# Altium PCB 1K5_Power_Factor_V0.PcbDoc (part 2 of 2)
Units mm, origin at the board's own origin, x right, y up, seen from the top; angles counter-clockwise.
Board outline 100 x 100.08 mm, 2 copper layers (Top Layer, Bottom Layer); 98 components, 49 nets, 261 pads, 152 vias.
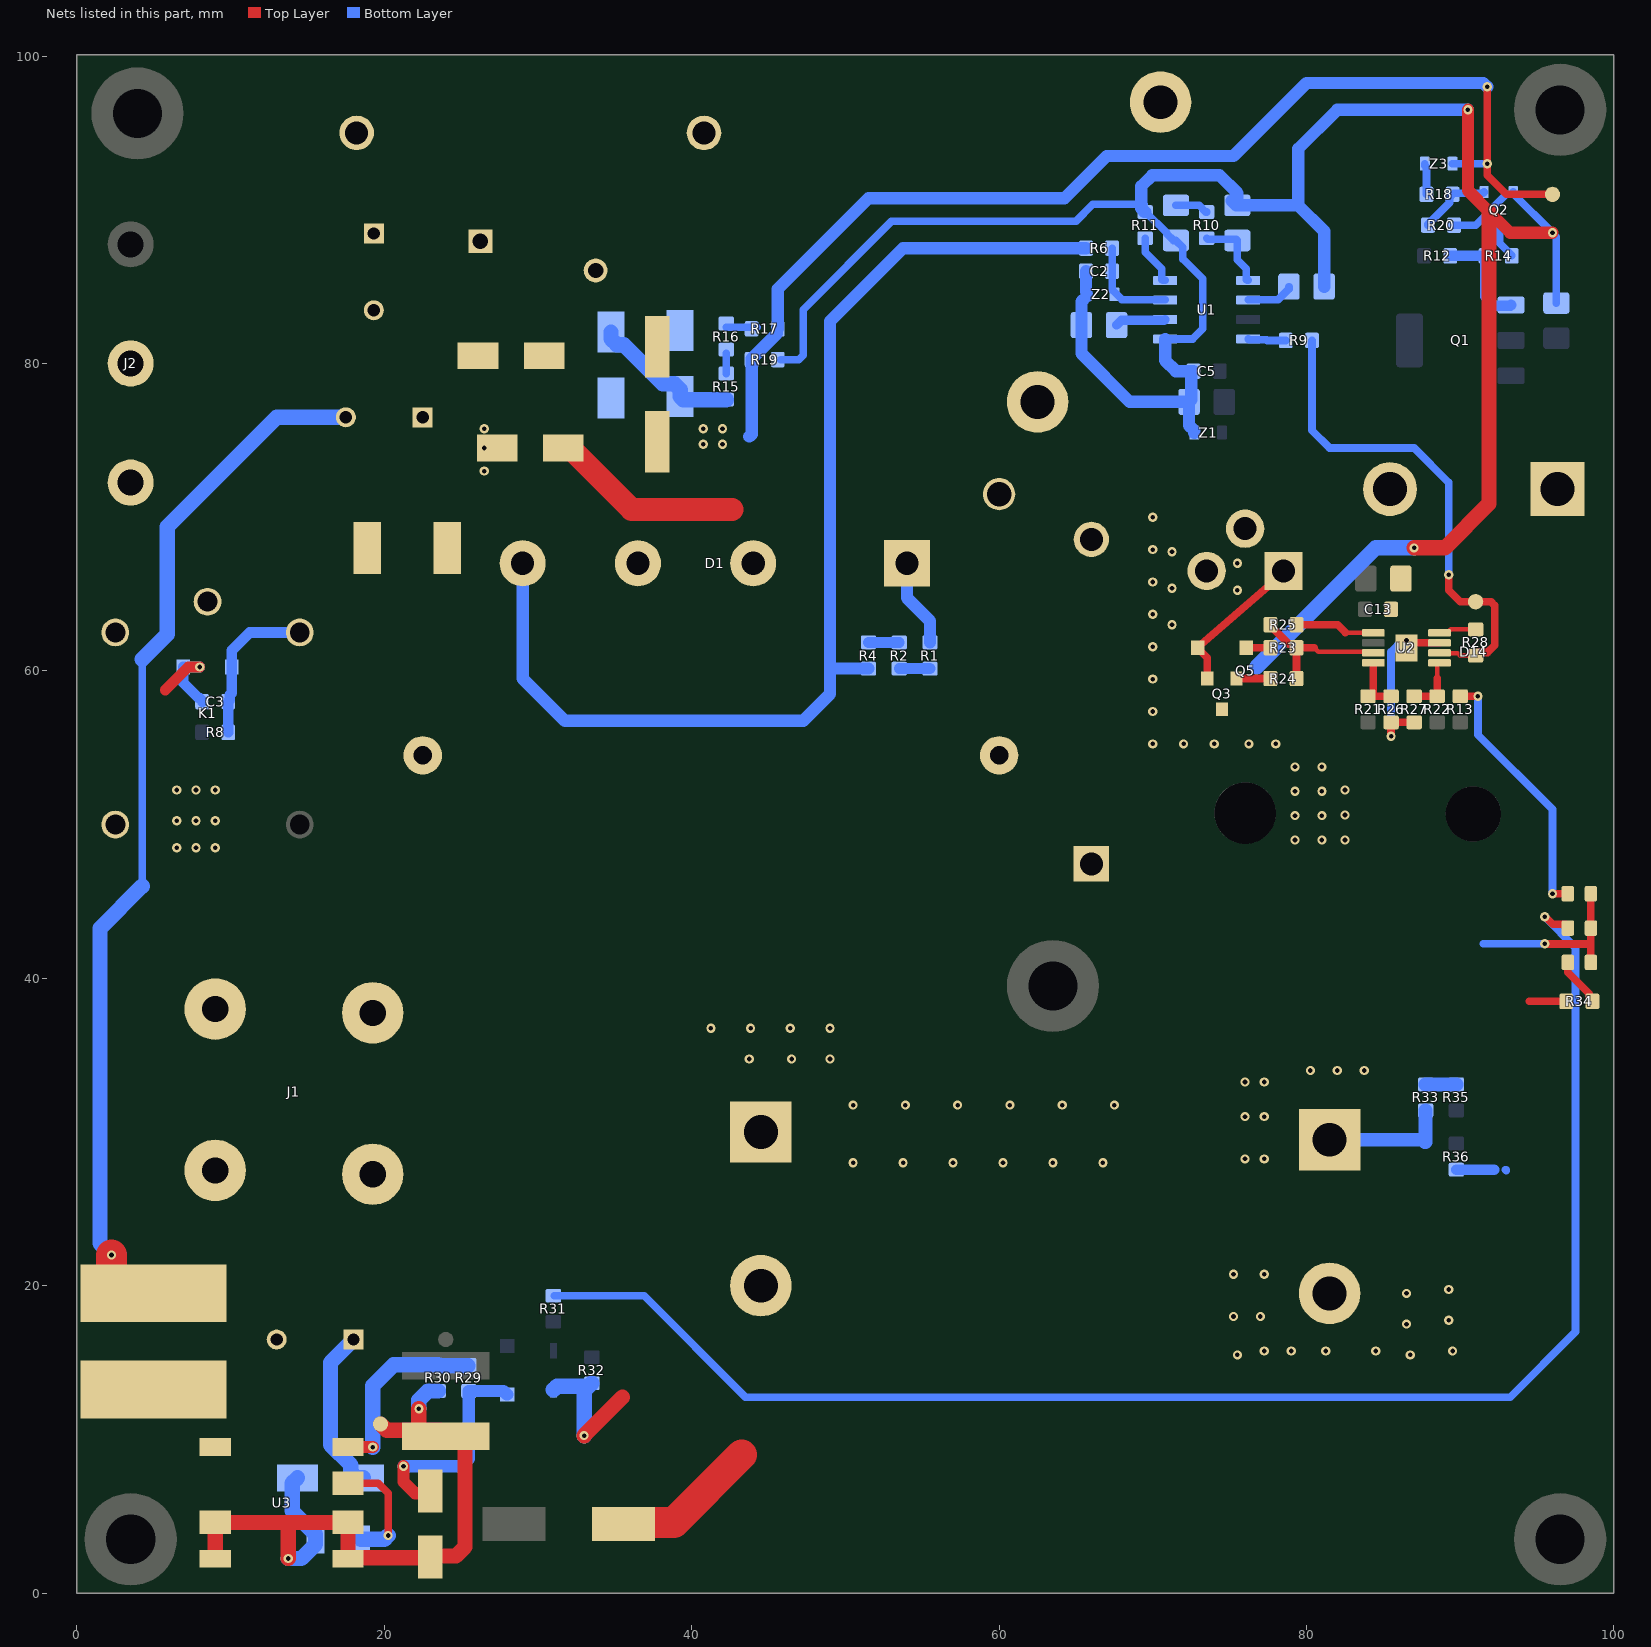
[diagram p2: the nets of this part, all layers, seen from the top]

## Via types
v1: diameter 0.6, hole 0.3, Top Layer to Bottom Layer, 112 vias
v2: diameter 1, hole 0.4, Top Layer to Bottom Layer, 40 vias

## Nets (pads, with @x,y where several pads share a name; then routed paths per layer and width w, separated by ;. In a path a pad name is that pad's centre, name@x,y a point inside that pad or via, vN(x,y) a via of type N, cw(c..) or ccw(c..) an arc to the next point about the centre after c; other vN are vias at no path point) (continued)
GND: C2.1 C3.1 C4.1 C5.1 C6.1 C7.1 C8.1 C9.1 C10.2 C11.1 C12.1 C13.1 C16.1 C17.1 C18.1 C19.2 C20.2 D2.2 D5.K D10.2 D11.K D12.2 D15.K J1.2 K1.2 Q2.2 Q3.3 Q5.3 R7.1 R11.1 R19.2 R20.2 R26.2 R27.2 R32.2 R36.2 U1.1 U2.3 U2.9 Z1.1 Z2.1 Z4.2 | length 224.6
  Top Layer w0.5: v1(85.5,55.75) R26.2@85.5,56.65 R27.2@87,56.65 ; v1(86.5,62) 86.675,61.825 U2.3@88.65,61.825 ; v1(95.5,42.25) 95.515,42.235 98.5,42.235 ; D15.K@98.5,41.032 98.5,42.235 ; D5.K@98.5,45.5 D11.K@98.5,43.266 98.5,42.235
  Top Layer w0.7: 5.75,58.75 7.25,60.25 v1(8,60.25)
  Top Layer w0.8: v1(90.5,96.5) 90.5,91.25 91.875,89.875 93.25,88.5 v1(96,88.5)
  Top Layer w1: v1(33,10.25) 35.5,12.75 ; v1(87,68) 89,68 91.875,70.875 91.875,89.875
  Top Layer w2: C17.1@35.55,4.5 35.646,4.596 38.846,4.596 43.257,9.007
  Bottom Layer w0.5: R19.2@45.8,80.25 46.957,80.25 47.25,80.543 47.25,83.5 53,89.25 65,89.25 66.1,90.35 69.25,90.35 69.45,90.35 ; R11.1@69.5,89.85 69.55,89.85 70.9,88.5 70.9,88.45 71.35,88 C8.1@71.5,88 71.95,87.55 71.95,86.8 73.25,85.5 73.25,82.25 72.595,81.595 U1.1@70.8,81.595 ; v1(85.5,55.75) 85.5,61.25 86.231,61.981 86.481,61.981 v1(86.5,62) ; R20.2@89.6,89 91,89 93,91 93.4,91 Q2.2@93.45,91.05 ; 91.5,42.25 v1(95.5,42.25) ; 92.95,27.55 cw(c92.95,27.5) 93,27.5 ; Q2.2@93.45,91.15 Q2.2@93.45,91.05 ; C10.2@96.25,83.929 96.25,88.223 96,88.473 v1(96,88.5) Q2.2@93.45,91.05
  Bottom Layer w0.7: v1(8,60.25) D2.2@6.925,60.25 6.925,59.225 7.9,58.25 7.95,58.25 8.15,58.05 C3.1@8.15,58 ; R36.2@89.75,27.55 92.2,27.55
  Bottom Layer w0.8: C2.1@65.65,86 65.658,85.75 65.658,84.7 Z2.1@65.7,84.5 65.7,84.375 65.357,84.032 C6.1@65.357,82.5 65.357,80.643 68.5,77.5 C4.1@72.357,77.5 ; R11.1@69.5,89.85 69.45,89.85 69.4,89.9 69.4,89.95 69.25,90.1 69.25,90.35 69.25,91.531 69.969,92.25 74.331,92.25 75.5,91.081 C9.1@75.5,90.286 ; U1.1@70.8,81.595 70.8,80.2 71.5,79.5 C5.1@72.65,79.5 72.503,79.353 72.503,77.646 C4.1@72.357,77.5 ; Z1.1@72.7,75.5 72.7,75.625 72.357,75.968 C4.1@72.357,77.5 ; C9.1@75.125,90.586 75.425,90.286 C9.1@75.5,90.286 ; C7.1@81.143,85 81.143,88.607 79.464,90.286 ; v1(90.5,96.5) 82,96.5 79.464,93.964 79.464,90.286 ; C9.1@75.5,90.286 79.464,90.286
  Bottom Layer w1: C18.1@18,16.5 16.5,15 16.5,9.65 17.825,8.325 17.825,7.875 18.2,7.5 D10.2@18.65,7.5 ; Z4.2@31,13.23 31.238,13.468 R32.2@33.318,13.468 ; v1(33,10.25) 33,13.15 R32.2@33.318,13.468 ; R32.2@33.5,13.65 R32.2@33.318,13.468 ; 76.75,60.25 84.5,68 v1(87,68)
  other v1: 75.5,15.5 86.75,15.5 77.25,15.75 79,15.75 81.25,15.75 84.5,15.75 89.5,15.75 86.5,17.5 89.25,17.75 75.25,18 77,18 86.5,19.5 89.25,19.75 75.25,20.75 77.25,20.75 79.25,49 81,49 82.5,49 79.25,50.583 81,50.583 82.5,50.625 79.25,52.167 81,52.167 82.5,52.25 79.25,53.75 81,53.75 70,55.25 72,55.25 74,55.25 76.25,55.25 78,55.25 70,57.357 70,59.464 70,61.571 71.25,63 70,63.679 75.5,65.25 71.25,65.375 70,65.786 75.5,67 71.25,67.75 70,67.893 70,70
ISENSE: C2.2 R6.2 U1.3 Z2.2 | length 6.4
  Bottom Layer w0.5: R6.2@67.35,87.5 C2.2@67.35,86 67.35,84.785 68,84.135 U1.3@70.8,84.135
NetC1_1: C1.1 D1.4 R4.2 R6.1 R7.2 | length 74.7
  Bottom Layer w0.8: D1.4@29,67 29,59.5 31.75,56.75 47.25,56.75 49,58.5 49,60.15 ; R4.2@51.5,60.15 49,60.15 ; R6.1@65.65,87.5 53.75,87.5 49,82.75 49,60.15
NetC1_2: C1.2 D1.1 D13.2 L3.1 R1.1 TP5.1 | length 5.8
  Bottom Layer w0.8: D1.1@54,67 54,64.75 55.5,63.25 R1.1@55.5,61.85
NetC3_2: C3.2 D2.1 K1.5 R8.2 | length 10.3
  Bottom Layer w0.7: R8.2@9.85,56 C3.2@9.85,58 9.95,58.1 9.95,58.435 10.075,58.56 10.075,61.325 11.25,62.5 K1.5@14.5,62.5
NetC6_2: C6.2 U1.2 | length 3.3
  Bottom Layer w0.6: C6.2@67.643,82.5 67.958,82.815 70.75,82.815 U1.2@70.8,82.865
NetC8_2: C8.2 R10.2 | length 2.2
  Bottom Layer w0.5: C8.2@71.5,90.286 73.014,90.286 73.45,89.85 R10.2@73.5,89.85
NetC9_2: C9.2 R10.1 U1.5 | length 5
  Bottom Layer w0.5: R10.1@73.5,88.15 73.575,88.075 75.425,88.075 C9.2@75.5,88 75.5,86.75 76.088,86.162 76.088,85.455 76.138,85.405 U1.5@76.2,85.405
NetC11_2: C11.2 R17.1 R19.1 TP2.1 Z3.2 | length 74.9
  Top Layer w0.5: v1(91.75,98) v1(91.75,93) 91.75,92.25 93,91 TP2.1@96,91
  Bottom Layer w0.5: Z3.2@89.5,93 v1(91.75,93)
  Bottom Layer w0.8: 43.75,75.25 43.9,75.4 R19.1@43.9,80.25 43.9,80.3 45.55,81.95 45.55,82.2 R17.1@45.6,82.25 45.6,84.85 51.5,90.75 64.25,90.75 67,93.5 75.25,93.5 80,98.25 91.5,98.25 v1(91.75,98)
  other v1: 40.75,74.75 42,74.75 40.75,75.75 42,75.75
NetC14_1: C14.1 C15.2 D10.1 L1.1 R30.2 TP3.1 U3.1 U3.2 U3.7 U3.8 | length 47.7
  Top Layer w1: U3.8@9,2.236 U3.7@9,4.598 13.75,4.598 ; v1(13.75,2.25) 13.75,4.598 ; TP3.1@19.75,11 20.15,10.6 L1.1@22.25,10.6 ; v1(22.25,12) L1.1@22.25,10.6 ; 13.75,4.598 U3.2@17.636,4.598 U3.1@17.636,2.236 17.693,2.293 22.943,2.293 C14.1@23,2.35 23.064,2.414 24.664,2.414 25.25,3 25.25,9.8 25.5,9.8 25.1,10.2 L1.1@24,10.2 23.6,10.6 L1.1@22.25,10.6
  Bottom Layer w1: v1(13.75,2.25) 14.605,2.25 15.525,3.17 C15.2@15.525,3.5 15.525,3.83 14,5.355 14,7.15 D10.1@14.35,7.5 ; v1(22.25,12) 22.25,12.564 22.836,13.15 R30.2@23.5,13.15
NetC14_2: C14.2 D8.1 R29.1 | length 14.6
  Top Layer w0.8: v1(21.25,8.25) 21.25,7.25 22,6.5 22.85,6.5 C14.2@23,6.65
  Bottom Layer w0.8: v1(21.25,8.25) 25,8.25 25.5,8.75 25.5,12.925 R29.1@25.5,13.15 27.75,13.15 27.975,12.925 D8.1@28,12.925
NetC15_1: C15.1 U3.3 | length 7.5
  Top Layer w0.5: U3.3@17.636,7.138 19.612,7.138 20.25,6.5 v1(20.25,3.75)
  Bottom Layer w1: C15.1@18.475,3.5 20,3.5 v1(20.25,3.75)
NetC16_2: C16.2 D9.1 L2.1 | length 69.3
  Top Layer w2: v1(2.25,22) 2.25,20.375 3.125,19.5 L2.1@5,19.5
  Bottom Layer w0.5: 4.25,46 4.25,60.75
  Bottom Layer w1: 2.75,22 v1(2.25,22) 1.5,22.75 1.5,43.25 4.25,46 ; 4.25,60.75 5.875,62.375 5.875,69.375 13,76.5 C16.2@17.5,76.5
  other v1: 26.5,73 26.5,74.5 26.5,75.75
NetC18_2: C18.2 L2.2 U3.5
NetD1_2: D1.2 D3.2 D9.2 F1.2 R3.2 | length 12.6
  Top Layer w1.5: D9.2@31.65,74.5 32.1,74.5 36.1,70.5 42.617,70.5
NetD1_3: D1.3 D4.2 D12.1 K1.3 R5.2
  other v1: 6.5,48.5 7.75,48.5 9,48.5 6.5,50.25 7.75,50.25 9,50.25 6.5,52.25 7.75,52.25 9,52.25
NetD3_1: D3.1 D4.1 R15.1 | length 9.8
  Bottom Layer w1: D4.1@34.75,82.05 34.75,81.6 35.125,81.225 35.575,81.225 38.125,78.675 38.875,78.675 39.25,78.3 D3.1@39.25,77.85 39.45,77.65 R15.1@42.25,77.65
NetD5_A: D5.A R13.2 | length 17
  Top Layer w0.5: R13.2@90,58.35 v1(91.15,58.35) ; v1(96,45.5) D5.A@97,45.5
  Bottom Layer w0.5: v1(91.15,58.35) 91.15,55.85 96,51 v1(96,45.5)
NetD6_1: D6.1 Q3.2 Q5.1 | length 9.8
  Top Layer w0.5: Q3.2@73.55,59.5 73.55,60.85 72.925,61.475 D6.1@72.925,61.5 73.125,61.725 77.5,65.5 Q5.1@78.5,66.5
NetD6_2: D6.2 R23.1 | length 1.6
  Top Layer w0.5: D6.2@76.075,61.5 R23.1@77.65,61.5
NetD11_A: D11.A R31.2 | length 100.6
  Top Layer w0.5: v1(95.5,44) 95.527,44 96.011,43.516 96.85,43.516 97,43.366 D11.A@97,43.266
  Bottom Layer w0.5: R31.2@31.05,19.35 36.9,19.35 43.5,12.75 93.25,12.75 97.5,17 97.5,42 v1(95.5,44)
NetD14_2: D14.2 L3.2 Q5.2
NetD15_A: D15.A R34.2 | length 3.2
  Top Layer w0.5: D15.A@97,41.032 97,40.4 98.4,39 98.4,38.7 R34.2@98.6,38.5
NetF1_1: F1.1 J2.2
NetJ2_1: J2.1 K1.1 R3.1 R5.1
NetQ1_1: Q1.1 R12.2 R14.1 | length 6.9
  Bottom Layer w0.7: R12.2@89.35,87 R14.1@91.65,87 91.65,84.35 92.25,83.75 93.25,83.75 Q1.1@93.3,83.8
NetQ2_1: Q2.1 R18.2 R20.1 | length 4.8
  Bottom Layer w0.5: R20.1@87.9,89 87.9,89.05 89.3,90.45 89.3,90.8 R18.2@89.5,91 89.575,91.075 91.5,91.075 91.55,91.125 Q2.1@91.55,91.15
NetQ2_3: Q2.3 R14.2 | length 2.5
  Bottom Layer w0.5: Q2.3@92.5,88.85 92.5,88.928 92.55,88.978 92.55,87.85 93.35,87.05 R14.2@93.35,87
NetQ3_1: Q3.1 R24.1 | length 2.2
  Top Layer w0.5: Q3.1@75.45,59.5 R24.1@77.65,59.5
NetR1_2: R1.2 R2.1 | length 2
  Bottom Layer w0.7: R2.1@53.5,60.15 R1.2@55.5,60.15
NetR2_2: R2.2 R4.1 | length 2
  Bottom Layer w0.7: R4.1@51.5,61.85 R2.2@53.5,61.85
NetR9_1: R9.1 U1.8 | length 2.5
  Bottom Layer w0.5: U1.8@76.2,81.595 76.25,81.545 77.405,81.545 77.45,81.5 R9.1@78.65,81.5
NetR9_2: R9.2 R28.2 TP1.1 U2.2 | length 33.1
  Top Layer w0.3: U2.2@88.65,61.175 88.675,61.15 89.835,61.15 89.985,61 R28.2@91,61
  Top Layer w0.5: v1(89.25,66.25) 89.25,65.25 90,64.5 TP1.1@91,64.5 92,64.5 92.25,64.25 92.25,61.676 91.774,61.2 91.2,61.2 R28.2@91,61
  Bottom Layer w0.5: R9.2@80.35,81.5 80.35,75.65 81.5,74.5 87,74.5 89.25,72.25 v1(89.25,66.25)
NetR11_2: R11.2 U1.4 | length 3.4
  Bottom Layer w0.5: R11.2@69.5,88.15 69.507,88.143 69.507,87.243 70.588,86.162 70.588,85.455 70.638,85.405 U1.4@70.8,85.405
NetR15_2: R15.2 R16.1 | length 1.3
  Bottom Layer w0.5: R15.2@42.25,79.35 R16.1@42.25,80.65
NetR16_2: R16.2 R17.2 | length 2
  Bottom Layer w0.5: R16.2@42.25,82.35 R17.2@44.25,82.35
NetR18_1: R18.1 Z3.1 | length 2
  Bottom Layer w0.5: Z3.1@87.7,93 87.7,92.875 87.8,92.775 R18.1@87.8,91
NetR21_2: R21.2 R26.1 U2.8 | length 3.8
  Top Layer w0.5: U2.8@84.35,60.525 84.35,58.65 84.05,58.35 R21.2@84,58.35 R26.1@85.5,58.35
NetR22_2: R22.2 R27.1 U2.1 | length 3.8
  Top Layer w0.3: 88.5,59.5 88.5,60.435 88.59,60.525 U2.1@88.65,60.525
  Top Layer w0.5: R27.1@87,58.35 R22.2@88.5,58.35 88.5,59.5
NetR23_2: R23.2 R24.2 R25.1 U2.7 | length 9.2
  Top Layer w0.3: 80.5,61.5 80.765,61.235 84.29,61.235 U2.7@84.35,61.175
  Top Layer w0.5: R25.1@77.65,63 77.65,62.95 78.85,61.75 R23.2@79.15,61.75 ; R24.2@79.35,59.5 R23.2@79.35,61.5 80.5,61.5
NetR25_2: R25.2 U2.5 | length 5.2
  Top Layer w0.3: 82.525,62.5 82.55,62.475 U2.5@84.35,62.475
  Top Layer w0.5: R25.2@79.35,63 82.025,63 82.525,62.5
NetR28_1: R28.1 U2.4 | length 2.4
  Top Layer w0.3: U2.4@88.65,62.475 89.145,62.475 89.37,62.7 R28.1@91,62.7
NetR29_2: R29.2 R30.1 U3.4 | length 12.3
  Top Layer w0.8: U3.4@17.636,9.5 v1(19.25,9.5)
  Bottom Layer w1: v1(19.25,9.5) 19.25,13.5 20.6,14.85 R30.1@23.5,14.85 ; R30.1@23.557,14.793 R29.2@25.443,14.793
NetR33_2: R33.2 R35.1 | length 2
  Bottom Layer w0.9: R33.2@87.75,33.1 87.9,33.1 R35.1@89.75,33.1
VBUS: C19.1 C20.1 D13.1 D14.1 J1.1 R33.1 R34.1 | length 10.8
  Top Layer w0.5: 94.5,38.5 R34.1@96.9,38.5
  Bottom Layer w0.9: C19.1@81.5,29.5 87.55,29.5 87.7,29.35 87.75,29.35 R33.1@87.75,31.4
  other v1: 50.5,28 53.75,28 57,28 60.25,28 63.5,28 66.75,28 76,28.25 77.25,28.25 76,31 77.25,31 50.5,31.75 53.9,31.75 57.3,31.75 60.7,31.75 64.1,31.75 67.5,31.75 76,33.25 77.25,33.25 80.25,34 82,34 83.75,34 43.75,34.75 46.5,34.75 49,34.75 41.25,36.75 43.833,36.75 46.417,36.75 49,36.75
VSENSE: R35.2 R36.1 | length 2.1
  Bottom Layer w0.9: R36.1@89.75,29.25 R35.2@89.75,31.4
VSENSE: C7.2 U1.6 | length 3.1
  Bottom Layer w0.5: U1.6@76.2,84.135 78.142,84.135 78.857,84.85 C7.2@78.857,85
pads on no net: C2.0 C3.0 C5.0 C13.0 D14. K1.4 PTH1.1 PTH2.1 PTH3.1 PTH5.1 Q1.0 Q2.0 Q5. R1.0 R2.0 R4.0 R6.0 R8.0 R9.0 R10.0 R11.0 R12.0 R13.0 R14.0 R15.0 R16.0 R17.0 R18.0 R19.0 R20.0 R21.0 R22.0 R23.0 R24.0 R25.0 R26.0 R27.0 R28.0 R29.0 R30.0 R31.0 R32.0 R33.0 R34.0 R35.0 R36.0 Z1.0 Z2.0 Z3.0
copper on no net:
  other v2: 3.5,1.2 96.5,1.2 1.874,1.874 5.126,1.874 94.874,1.874 98.126,1.874 1.2,3.5 5.8,3.5 94.2,3.5 98.8,3.5 1.874,5.126 5.126,5.126 94.874,5.126 98.126,5.126 3.5,5.8 96.5,5.8 63.5,37.2 61.874,37.874 65.126,37.874 61.2,39.5 65.8,39.5 61.874,41.126 65.126,41.126 63.5,41.8 96.5,94.2 94.874,94.874 98.126,94.874 94.2,96.5 98.8,96.5 94.874,98.126 98.126,98.126 96.5,98.8

## Polygon pours and split planes (outlines as drawn)
VBUS on Top Layer "NONET_L02_P-001" (solid, pour order 17): 40,25 40,46.71 cw(c42.54,46.71) 42.54,49.25 69.25,49.25 cw(c69.25,47.25) 71.25,47.25 ccw(c73.5,47.25) 73.5,45 83.46,45 ccw(c83.46,47.54) 86,47.54 86,52.21 cw(c88.54,52.21) 88.54,54.75 90.71,54.75 ccw(c90.71,57.29) 93.25,57.29 93.25,82.96 cw(c95.79,82.96) 95.79,85.5 97.5,85.5 cw(c97.5,83.5) 99.5,83.5 99.5,49.79 cw(c96.96,49.79) 96.96,47.25 96,47.25 ccw(c96,46) 94.75,46 94.75,25
GND on Top Layer "NONET_L02_P-001" (solid, pour order 4): 36.25,78.75 37.825,78.75 40.25,78.75 40.25,83 28.5,83 ccw(c28.5,82.5) 28,82.5 28,80 cw(c26.001,79.999) 26,78 21,78 ccw(c21,77) 20,77 20,74.5 cw(c17.5,74.5) 17.5,72 ccw(c17.5,70.5) 16,70.5 16,62.5 cw(c12.001,62.499) 12,58.5 9,58.5 cw(c9,63) 4.5,63 4.5,63.5 ccw(c2.001,63.501) 2,66 1,66 ccw(c0.999,65.501) 0.5,65.5 0.5,54.489 cw(c5.013,-30.694) 10,54.463 10,45.897 1.464,46.007 1.464,27 ccw(c5,27) 5.5,23.5 10.973,23.5 cw(c10.974,19.582) 14.891,19.651 14.982,14.518 ccw(c16.018,14.536) 16.018,13.5 18.5,13.5 ccw(c18.5,14.5) 19.5,14.5 19.5,18 29,18 39.5,7.5 97.5,7.5 ccw(c97.5,9) 99,9 99,24 38,24 35.533,26.467 ccw(c-444.653,34.89) 35.547,42.414 ccw(c34.387,42.395) 34.112,43.522 ccw(c27.335,-499.846) 19,43.5 ccw(c22.388,43.447) 19,43.394 19,57.422 21,60.842 21,69.5 cw(c23,69.5) 23,71.5 24.5,71.5 ccw(c24.5,72.5) 25.5,72.5 25.5,76 cw(c26,76) 26,76.5 34,76.5
NetC16_2 on Top Layer "NONET_L02_P-001" (solid, pour order 38): 26,76.25 26,72.5 29,72.5 29,76.25
NetD1_3 on Top Layer "NONET_L02_P-001" (solid, pour order 37): 9.273,53.75 0.5,53.75 0.5,47 9.5,47 9.5,53.523
NetD1_2 on Top Layer "NONET_L02_P-001" (solid, pour order 22): 31.75,95.96 cw(c34.29,95.96) 34.29,98.5 45.96,98.5 cw(c45.96,95.96) 48.5,95.96 48.5,62.79 cw(c45.96,62.79) 45.96,60.25 42.54,60.25 cw(c42.54,62.79) 40,62.79 40,71.25 cw(c42,71.25) 42,73.25 ccw(c42,74.5) 43.25,74.5 43.25,83.75 ccw(c42.25,83.75) 42.25,84.75 34,84.75 cw(c34,87) 31.75,87 31.75,87.5
NetC18_2 on Top Layer "NONET_L02_P-001" (solid, pour order 31): 14,19.75 14,10.75 cw(c11.5,10.75) 11.5,8.25 2.79,8.25 cw(c2.79,10.79) 0.25,10.79 0.25,15.5 cw(c0.5,15.5) 0.5,15.75 10,15.75 ccw(c10,16.25) 10.5,16.25 10.5,19.25 cw(c11,19.25) 11,19.75 12.5,19.75
NetC11_2 on Top Layer "NONET_L02_P-001" (solid, pour order 27): 36,77.5 36,72.75 36.75,72 39.5,72 ccw(c39.5,72.25) 39.75,72.25 39.75,73.25 cw(c40.25,73.25) 40.25,73.75 41.75,73.75 ccw(c41.75,74.5) 42.5,74.5 42.5,77.25 ccw(c41.75,77.25) 41.75,78 36.75,78 ccw(c36.75,77.25) 36,77.25
NetC1_1 on Top Layer "NONET_L02_P-001" (solid, pour order 21): 30.21,45.25 ccw(c30.21,47.79) 32.75,47.79 32.75,69.5 ccw(c31.25,69.5) 31.25,71 23.75,71 ccw(c23.75,69) 21.75,69 21.75,58.75 cw(c20,58.75) 20,57 20,45.25
GND on Top Layer "NONET_L02_P-001" (solid, remove dead copper, pour order 18): 69.5,54.25 77.5,54.25 78.5,53.25 78.5,48 83.5,48 83.5,54.25 79.5,58.25 72,58.25 71.75,58.5 71.75,63.5 73,64.75 75.25,64.75 ccw(c75.25,65.5) 76,65.5 76,66.75 ccw(c74.75,66.75) 74.75,68 72.5,68 cw(c72.5,68.25) 72.25,68.25 ccw(c72.5,68.25) 72.5,68 72,68 cw(c72,68.25) 71.75,68.25 71.75,71.75 ccw(c70.25,71.75) 70.25,73.25 ccw(c70.25,72) 69,72 69,70.75 69,54.75 ccw(c69.5,54.75)
GND on Top Layer "NONET_L02_P-001" (solid, pour order 12): 85,63.5 85,68.25 85.25,68.5 87.5,68.5 87.5,60 85.5,60 85.5,63
NetD14_2 on Top Layer "NONET_L02_P-001" (solid, pour order 9): 76.492,67.508 ccw(c76.48,67.511) 76.478,67.522 ccw(c75.977,69.5) 78.017,69.5 86.96,69.5 ccw(c86.96,72.04) 89.5,72.04 89.5,96.96 ccw(c86.96,96.96) 86.96,99.5 65.5,99.5 ccw(c65.5,97) 63,97 63,88.54 ccw(c65.54,88.54) 65.54,86 69.5,86 cw(c69.5,83.5) 72,83.5 72,71 ccw(c75.373,71) 75.373,67.627 76.438,67.627 ccw(c76.51,67.588)
NetC1_2 on Top Layer "NONET_L02_P-001" (solid, pour order 6): 49.5,81.96 cw(c52.04,81.96) 52.04,84.5 68.5,84.5 68.5,51.5 49.5,51.5 49.5,54.5
NetD1_3 on Top Layer "NONET_L02_P-001" (solid, pour order 3): 16,84.5 27.5,84.5 27.5,80.5 cw(c25.5,80.5) 25.5,78.5 17.54,78.5 cw(c17.54,81.04) 15,81.04 15,84.5
NetJ2_1 on Top Layer "NONET_L02_P-001" (solid, pour order 1): 12,62 12,66.5 14.5,66.5 14.5,85 28,85 ccw(c28,87.5) 30.5,87.5 ccw(c28,87.5) 28,90 12.5,90 ccw(c12.5,88) 10.5,88 10.5,77.5 cw(c9.5,77.5) 9.5,76.5 1.5,76.5 ccw(c1.5,75.5) 0.5,75.5 0.5,68 ccw(c2,68) 2,66.5 2.46,66.5 cw(c2.46,63.96) 5,63.96 5,62 10,62
NetF1_1 on Top Layer "NONET_L02_P-001" (solid, pour order 0): 0.5,77 8,77 ccw(c8,78.5) 9.5,78.5 9.5,88.46 cw(c12.04,88.46) 12.04,91 24.96,91 ccw(c24.96,93.54) 27.5,93.54 27.5,96.96 ccw(c24.96,96.96) 24.96,99.5 10.54,99.5 ccw(c10.54,96.96) 8,96.96 8,94 cw(c6.5,94) 6.5,92.5 5.5,92.5 5.5,86.5 cw(c3.5,86.5) 3.5,84.5 0.5,84.5 0.5,77.5
VBUS on Bottom Layer "NONET_L02_P-001" (solid, pour order 33): 3.25,40.004 3.25,33.5 ccw(c5,33.5) 5,31.75 27.716,31.75 cw(c27.716,30.156) 29.31,30.209 29.432,26.533 ccw(c31.534,26.603) 31.534,24.5 84.25,24.5 ccw(c84.25,26.25) 86,26.25 86,33.015 ccw(c83.791,33.015) 83.765,35.224 58.818,34.93 cw(c58.796,36.784) 56.942,36.809 56.971,38.998 ccw(c54.823,39.026) 54.84,41.174 4.829,41.574 ccw(c4.819,40.005)
EARTH on Bottom Layer "NONET_L02_P-001" (solid, pour order 39): 0.5,85.5 7.75,85.5 7.75,99.75 0.5,99.75
NetC16_2 on Bottom Layer "NONET_L02_P-001" (solid, pour order 36): 27.25,72.5 27.25,76.75 23.75,76.75 23.75,75.25 23.5,75 19.75,75 19.75,77.75 15,77.75 14.75,77.5 15,77.25 15,72.75 15.25,72.5
NetC11_2 on Bottom Layer "NONET_L02_P-001" (solid, pour order 35): 40.25,76.5 40.25,74 45,74 45,76.5
GND on Bottom Layer "NONET_L02_P-001" (solid, pour order 34): 75.25,22.75 89.75,22.75 91.25,24.25 91.25,33.79 88.04,37 80.25,37 cw(c80.25,38.75) 78.5,38.75 78.5,52.75 ccw(c77.25,52.75) 77.25,54 71.04,54 cw(c71.04,56.54) 68.5,56.54 68.5,71.75 cw(c69.75,71.75) 69.75,73 70.96,73 cw(c70.96,70.46) 73.5,70.46 73.5,69.25 ccw(c75.25,69.25) 75.25,67.5 76.25,67.5 cw(c76.25,67.25) 76.5,67.25 76.5,61.5 80.25,57.75 83,55 83,47.5 89.75,47.5 cw(c89.75,44.25) 93,44.25 93,39 ccw(c95.25,39) 95.25,36.75 cw(c95.25,35.75) 96.25,35.75 96.25,19.75 cw(c91.25,19.75) 91.25,14.75 75.5,14.75 cw(c75.5,16) 74.25,16 74.25,21.75 cw(c75.25,21.75)
NetD1_2 on Bottom Layer "NONET_L02_P-001" (solid, pour order 30): 38.5,80.25 41,80.25 41,88.96 cw(c43.54,88.96) 43.54,91.5 43.75,91.5 ccw(c43.75,93.75) 46,93.75 46,98 ccw(c45.25,98) 45.25,98.75 33.5,98.75 ccw(c33.5,97.25) 32,97.25 32,86.25 ccw(c33.5,86.25) 33.5,84.75 38,84.75 38,80.75
NetD1_3 on Bottom Layer "NONET_L02_P-001" (solid, pour order 26): 6,52.5 6,45.5 7.25,44.25 18.5,44.25 20,45.75 20,55 cw(c22,55) 22,57 23.96,57 ccw(c23.96,59.54) 26.5,59.54 26.5,67.75 cw(c28,67.75) 28,69.25 31.25,69.25 cw(c31.25,67.25) 33.25,67.25 33.25,62.29 ccw(c35.79,62.29) 35.79,59.75 38.71,59.75 ccw(c38.71,62.29) 41.25,62.29 41.25,69 35.75,74.5 35.75,78 ccw(c34,78) 34,79.75 32.5,79.75 32.5,84 ccw(c30.75,84) 30.75,85.75 13.29,85.75 ccw(c13.29,83.21) 10.75,83.21 10.75,81.5 ccw(c13,81.5) 13,79.25 25.5,79.25 cw(c25.5,76.75) 28,76.75 28,72.25 17.75,72.25 ccw(c17.75,70.25) 15.75,70.25 15.75,56.04 cw(c13.21,56.04) 13.21,53.5 7,53.5

## Other copper
Top Layer:
  pour cut-out: 58.75,43 58.75,35.5 68.25,35.5 68.25,43
  pour cut-out: 88.75,48.5 93,48.5 93,52.75 88.75,52.75
  pour cut-out: 16.25,40.25 16.25,35.25 22.25,35.25 22.25,40.25
  pour cut-out: 6,40.5 6,35.5 12,35.5 12,40.5
Bottom Layer:
  pour cut-out: 13,51.25 13,48.5 16,48.5 16,51.25

## Silkscreen, mask and mechanical layers (free items; w line width, h text height)
Top Overlay:
  drawing of 661 lines, arcs and shapes, not listed
  text "Layer" at 124.969,206.674 h1.52
  text "Name" at 135.38,206.674 h1.52
  text "Material" at 158.996,206.674 h1.52
  text "Thickness" at 180.834,206.674 h1.52
  text "Constant" at 197.34,206.674 h1.52
  text "Board Layer Stack" at 211.814,206.674 h1.52
  text "Top Overlay" at 135.38,203.626 h1.52
  text "Top Solder" at 135.38,200.578 h1.52
  text "Solder Resist" at 158.996,200.578 h1.52
  text "0.40mil" at 180.834,200.578 h1.52
  text "3.5" at 197.34,200.578 h1.52
  text "1" at 124.969,197.53 h1.52
  text "Top Layer" at 135.38,197.53 h1.52
  text "1.40mil" at 180.834,197.53 h1.52
  text "Dielectric 1" at 135.38,194.482 h1.52
  text "FR-4" at 158.996,194.482 h1.52
  text "12.60mil" at 180.834,194.482 h1.52
  text "4.8" at 197.34,194.482 h1.52
  text "2" at 124.969,191.434 h1.52
  text "Bottom Layer" at 135.38,191.434 h1.52
  text "1.40mil" at 180.834,191.434 h1.52
  text "Bottom Solder" at 135.38,188.386 h1.52
  text "Solder Resist" at 158.996,188.386 h1.52
  text "0.40mil" at 180.834,188.386 h1.52
  text "3.5" at 197.34,188.386 h1.52
  text "Bottom Overlay" at 135.38,185.338 h1.52
  text "LED_VBAIS" at 93.606,52.406 h0.8
  text "LED_15V" at 93.641,50.906 h0.8
  text "LED_VOUT" at 93.614,49.406 h0.8
  text "1K5W GUC FAKTORU DUZELTICI" at 71.504,4.254 h1
  text "V1.0" at 81.004,2.504 h1
  text "DIKKAT : YUKSEK  GERILIM" at 54.648,1.254 h0.8
  text "TUB22xx-1024" at 77.254,1.004 h1
  text "UCC27424DGNR footprint için top solder güncenlemedir çunku birbirle birbirene değişyor" at 120.75,-25.4 h0.76
Mechanical 1:
  lines w0.3: 0,100 0,0 100,0 100,100 ; 0,100.076 100,100.076
Drill Drawing:
  drawing of 151 lines, arcs and shapes, not listed
  text "Symbol" at 124.476,62.234 h1.83
  text "Count" at 137.326,62.234 h1.83
  text "Hole Size" at 152.308,62.234 h1.83
  text "Plated" at 181.509,62.234 h1.83
  text "Hole Type" at 194.358,62.234 h1.83
  text "Drill Layer Pair" at 212.997,62.234 h1.83
  text "Via/Pad" at 251.086,62.234 h1.83
  text "Pad Shape" at 266.068,62.234 h1.83
  text "Template" at 285.011,62.234 h1.83
  text "Description" at 314.72,62.234 h1.83
  text "Hole Tolerance (+)" at 336.406,62.234 h1.83
  text "Hole Tolerance (-)" at 370.28,62.234 h1.83
  text "Hole Length" at 404.153,62.234 h1.83
  text "Routed Path Length" at 426.144,62.234 h1.83
  text "1" at 137.326,58.424 h1.52
  text "1.600mm (62.99mil)" at 152.308,58.424 h1.52
  text "PTH" at 181.509,58.424 h1.52
  text "Round" at 194.358,58.424 h1.52
  text "Top Layer - Bottom Layer" at 212.997,58.424 h1.52
  text "Pad" at 251.086,58.424 h1.52
  text "Rounded" at 266.068,58.424 h1.52
  text "c210h160" at 285.011,58.424 h1.52
  text "-" at 404.153,58.424 h1.52
  text "-" at 426.144,58.424 h1.52
  text "1" at 137.326,54.614 h1.52
  text "3.600mm (141.73mil)" at 152.308,54.614 h1.52
  text "NPTH" at 181.509,54.614 h1.52
  text "Round" at 194.358,54.614 h1.52
  text "Top Layer - Bottom Layer" at 212.997,54.614 h1.52
  text "Pad" at 251.086,54.614 h1.52
  text "Rounded" at 266.068,54.614 h1.52
  text "c360hn360m360p360" at 285.011,54.614 h1.52
  text "-" at 404.153,54.614 h1.52
  text "-" at 426.144,54.614 h1.52
  text "C" at 123.738,54.36 h1.69
  text "1" at 137.326,50.804 h1.52
  text "4.000mm (157.48mil)" at 152.308,50.804 h1.52
  text "NPTH" at 181.509,50.804 h1.52
  text "Round" at 194.358,50.804 h1.52
  text "Top Layer - Bottom Layer" at 212.997,50.804 h1.52
  text "Pad" at 251.086,50.804 h1.52
  text "Rounded" at 266.068,50.804 h1.52
  text "c400hn400m400p400" at 285.011,50.804 h1.52
  text "-" at 404.153,50.804 h1.52
  text "-" at 426.144,50.804 h1.52
  text "B" at 123.738,50.55 h1.69
  text "2" at 137.326,46.994 h1.52
  text "1.000mm (39.37mil)" at 152.308,46.994 h1.52
  text "PTH" at 181.509,46.994 h1.52
  text "Round" at 194.358,46.994 h1.52
  text "Top Layer - Bottom Layer" at 212.997,46.994 h1.52
  text "Pad" at 251.086,46.994 h1.52
  text "(Mixed)" at 266.068,46.994 h1.52
  text "(Mixed)" at 285.011,46.994 h1.52
  text "-" at 404.153,46.994 h1.52
  text "-" at 426.144,46.994 h1.52
  text "2" at 137.326,43.184 h1.52
  text "1.200mm (47.24mil)" at 152.308,43.184 h1.52
  text "PTH" at 181.509,43.184 h1.52
  text "Round" at 194.358,43.184 h1.52
  text "Top Layer - Bottom Layer" at 212.997,43.184 h1.52
  text "Pad" at 251.086,43.184 h1.52
  text "Rounded" at 266.068,43.184 h1.52
  text "c250h120" at 285.011,43.184 h1.52
  text "-" at 404.153,43.184 h1.52
  text "-" at 426.144,43.184 h1.52
  text "4" at 137.326,39.374 h1.52
  text "1.510mm (59.45mil)" at 152.308,39.374 h1.52
  text "PTH" at 181.509,39.374 h1.52
  text "Round" at 194.358,39.374 h1.52
  text "Top Layer - Bottom Layer" at 212.997,39.374 h1.52
  text "Pad" at 251.086,39.374 h1.52
  text "(Mixed)" at 266.068,39.374 h1.52
  text "(Mixed)" at 285.011,39.374 h1.52
  text "-" at 404.153,39.374 h1.52
  text "-" at 426.144,39.374 h1.52
  text "5" at 137.326,35.564 h1.52
  text "1.300mm (51.18mil)" at 152.308,35.564 h1.52
  text "PTH" at 181.509,35.564 h1.52
  text "Round" at 194.358,35.564 h1.52
  text "Top Layer - Bottom Layer" at 212.997,35.564 h1.52
  text "Pad" at 251.086,35.564 h1.52
  text "Rounded" at 266.068,35.564 h1.52
  text "c181h130z152m181p90" at 285.011,35.564 h1.52
  text "-" at 404.153,35.564 h1.52
  text "-" at 426.144,35.564 h1.52
  text "A" at 123.738,35.31 h1.69
  text "5" at 137.326,31.754 h1.52
  text "3.200mm (125.98mil)" at 152.308,31.754 h1.52
  text "PTH" at 181.509,31.754 h1.52
  text "Round" at 194.358,31.754 h1.52
  text "Top Layer - Bottom Layer" at 212.997,31.754 h1.52
  text "Pad" at 251.086,31.754 h1.52
  text "Rounded" at 266.068,31.754 h1.52
  text "c600h320" at 285.011,31.754 h1.52
  text "-" at 404.153,31.754 h1.52
  text "-" at 426.144,31.754 h1.52
  text "6" at 137.326,27.944 h1.52
  text "0.800mm (31.50mil)" at 152.308,27.944 h1.52
  text "PTH" at 181.509,27.944 h1.52
  text "Round" at 194.358,27.944 h1.52
  text "Top Layer - Bottom Layer" at 212.997,27.944 h1.52
  text "Pad" at 251.086,27.944 h1.52
  text "(Mixed)" at 266.068,27.944 h1.52
  text "(Mixed)" at 285.011,27.944 h1.52
  text "-" at 404.153,27.944 h1.52
  text "-" at 426.144,27.944 h1.52
  text "7" at 137.326,24.134 h1.52
  text "1.500mm (59.06mil)" at 152.308,24.134 h1.52
  text "PTH" at 181.509,24.134 h1.52
  text "Round" at 194.358,24.134 h1.52
  text "Top Layer - Bottom Layer" at 212.997,24.134 h1.52
  text "Pad" at 251.086,24.134 h1.52
  text "(Mixed)" at 266.068,24.134 h1.52
  text "(Mixed)" at 285.011,24.134 h1.52
  text "-" at 404.153,24.134 h1.52
  text "-" at 426.144,24.134 h1.52
  text "7" at 137.326,20.324 h1.52
  text "1.700mm (66.93mil)" at 152.308,20.324 h1.52
  text "PTH" at 181.509,20.324 h1.52
  text "Round" at 194.358,20.324 h1.52
  text "Top Layer - Bottom Layer" at 212.997,20.324 h1.52
  text "Pad" at 251.086,20.324 h1.52
  text "Rounded" at 266.068,20.324 h1.52
  text "(Mixed)" at 285.011,20.324 h1.52
  text "-" at 404.153,20.324 h1.52
  text "-" at 426.144,20.324 h1.52
  text "8" at 137.326,16.514 h1.52
  text "2.200mm (86.61mil)" at 152.308,16.514 h1.52
  text "PTH" at 181.509,16.514 h1.52
  text "Round" at 194.358,16.514 h1.52
  text "Top Layer - Bottom Layer" at 212.997,16.514 h1.52
  text "Pad" at 251.086,16.514 h1.52
  text "(Mixed)" at 266.068,16.514 h1.52
  text "(Mixed)" at 285.011,16.514 h1.52
  text "-" at 404.153,16.514 h1.52
  text "-" at 426.144,16.514 h1.52
  text "40" at 137.326,12.704 h1.52
  text "0.400mm (15.75mil)" at 152.308,12.704 h1.52
  text "PTH" at 181.509,12.704 h1.52
  text "Round" at 194.358,12.704 h1.52
  text "Top Layer - Bottom Layer" at 212.997,12.704 h1.52
  text "Via" at 251.086,12.704 h1.52
  text "Rounded" at 266.068,12.704 h1.52
  text "v100h40" at 285.011,12.704 h1.52
  text "-" at 404.153,12.704 h1.52
  text "-" at 426.144,12.704 h1.52
  text "112" at 137.326,8.894 h1.52
  text "0.300mm (11.81mil)" at 152.308,8.894 h1.52
  text "PTH" at 181.509,8.894 h1.52
  text "Round" at 194.358,8.894 h1.52
  text "Top Layer - Bottom Layer" at 212.997,8.894 h1.52
  text "Via" at 251.086,8.894 h1.52
  text "Rounded" at 266.068,8.894 h1.52
  text "v60h30" at 285.011,8.894 h1.52
  text "-" at 404.153,8.894 h1.52
  text "-" at 426.144,8.894 h1.52
  text "201 Total" at 137.326,5.084 h1.52

## Text inside footprints (layer, text, board x,y; h text height)
D5: Top 3D Body "+" at 96.433,44.892 h0.5 r180
D11: Top 3D Body "+" at 96.433,42.658 h0.5 r180
D15: Top 3D Body "+" at 96.433,40.424 h0.5 r180